# Altium PCB PCB1.PcbDoc
Units mil, origin at the board's own origin, x right, y up, seen from the top; angles counter-clockwise.
Board outline 1315.92 x 860.73 mil, 2 copper layers (Top Layer, Bottom Layer); 22 components, 44 nets, 157 pads, 30 vias.
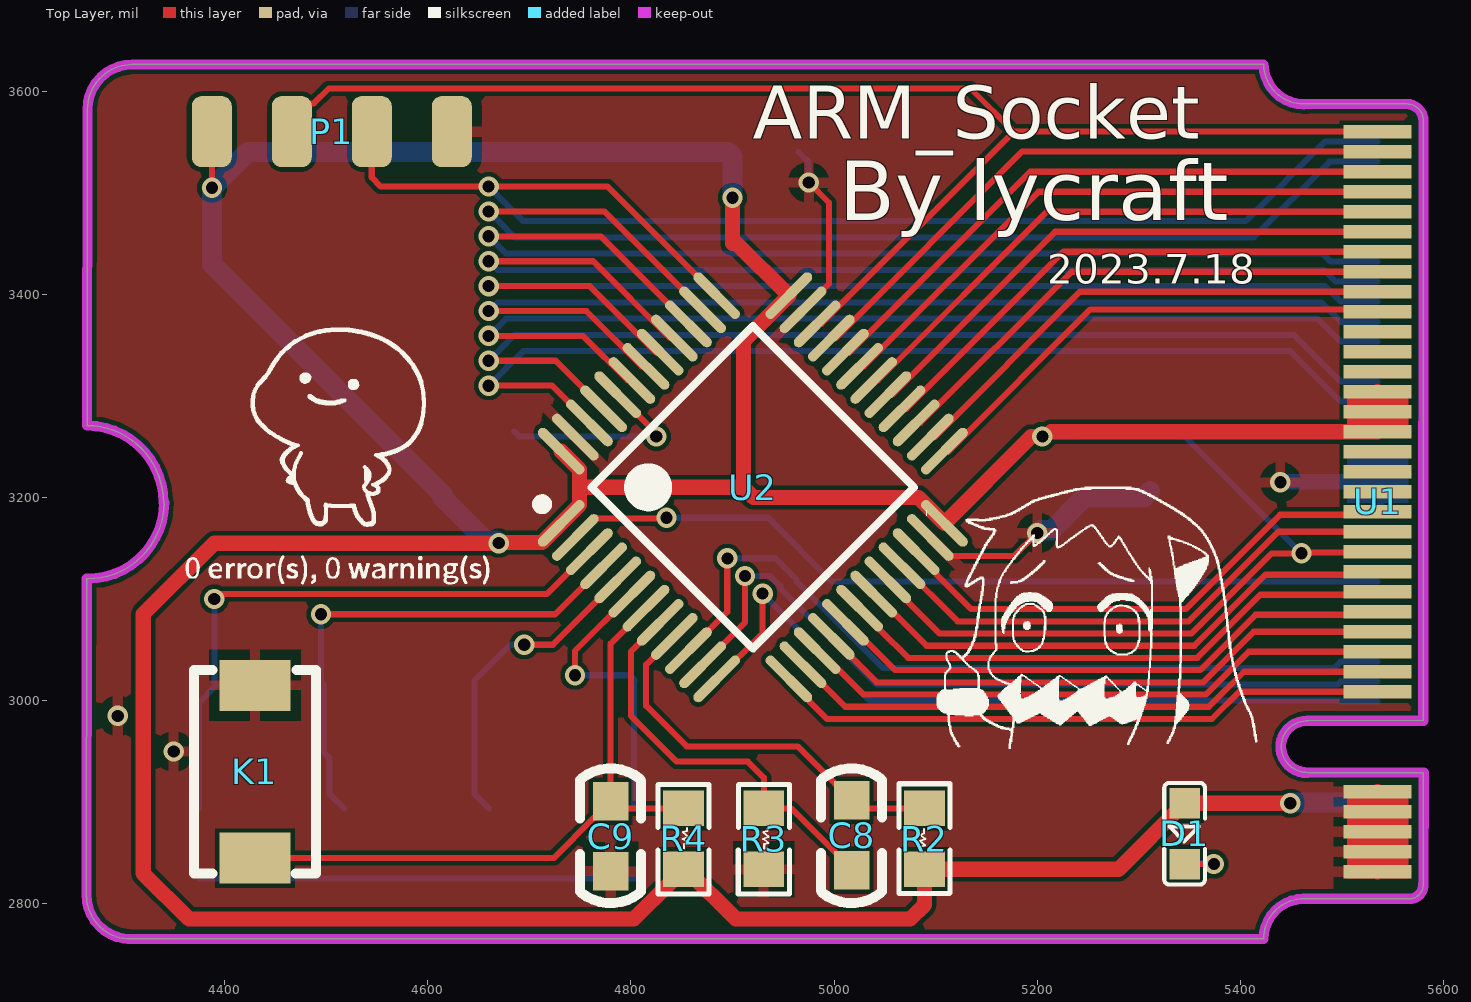
[diagram p0: Top Layer view]
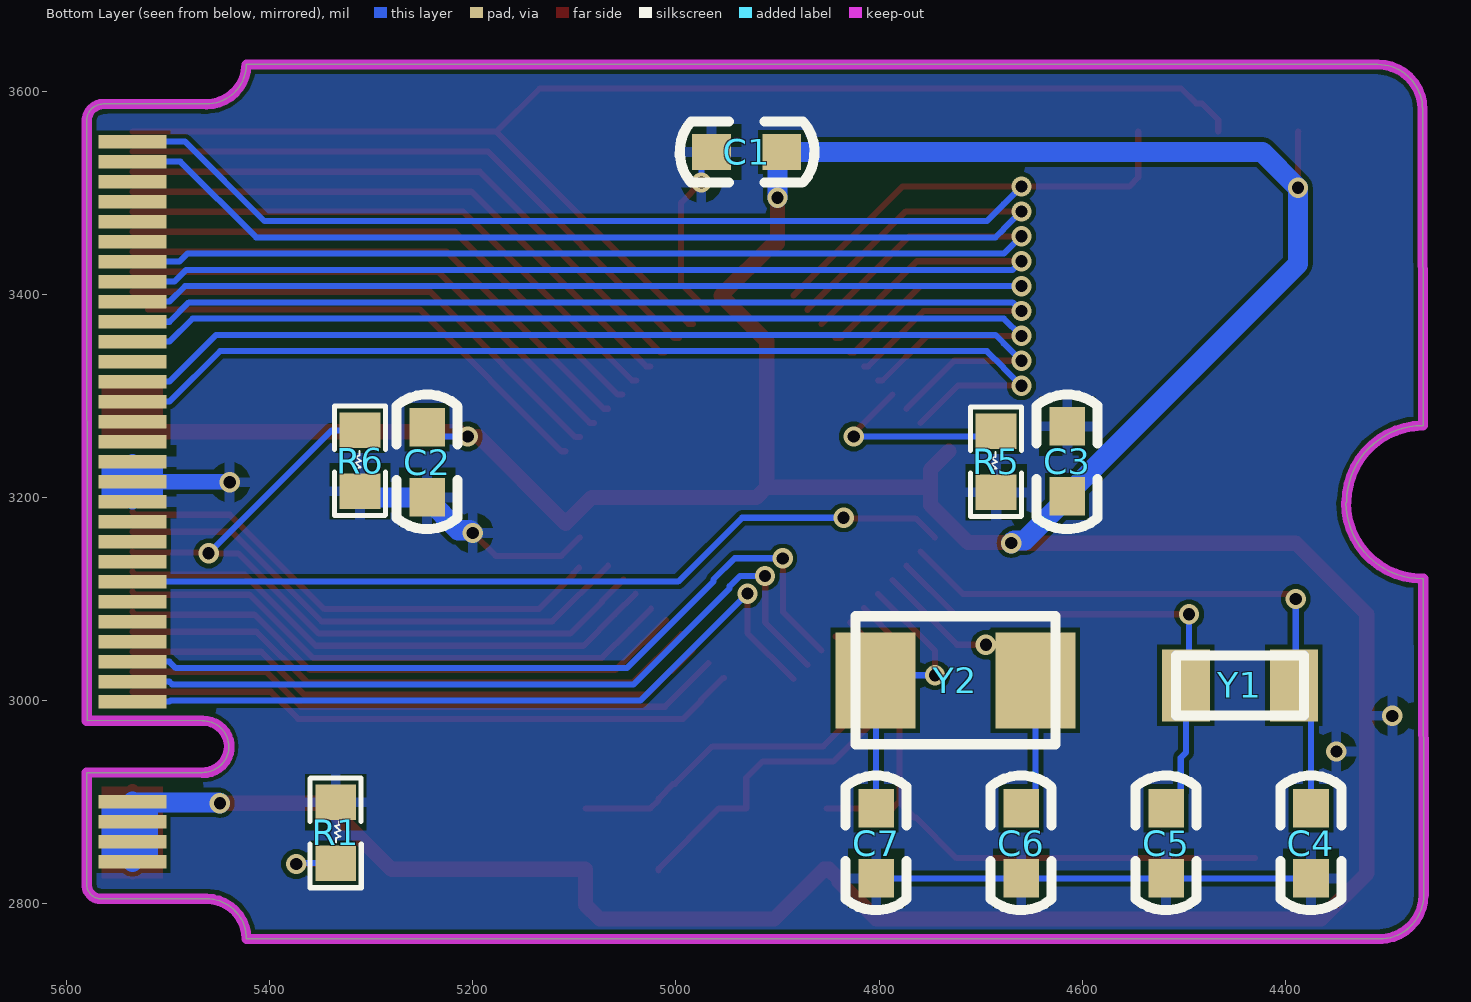
[diagram p1: Bottom Layer view, seen from below]
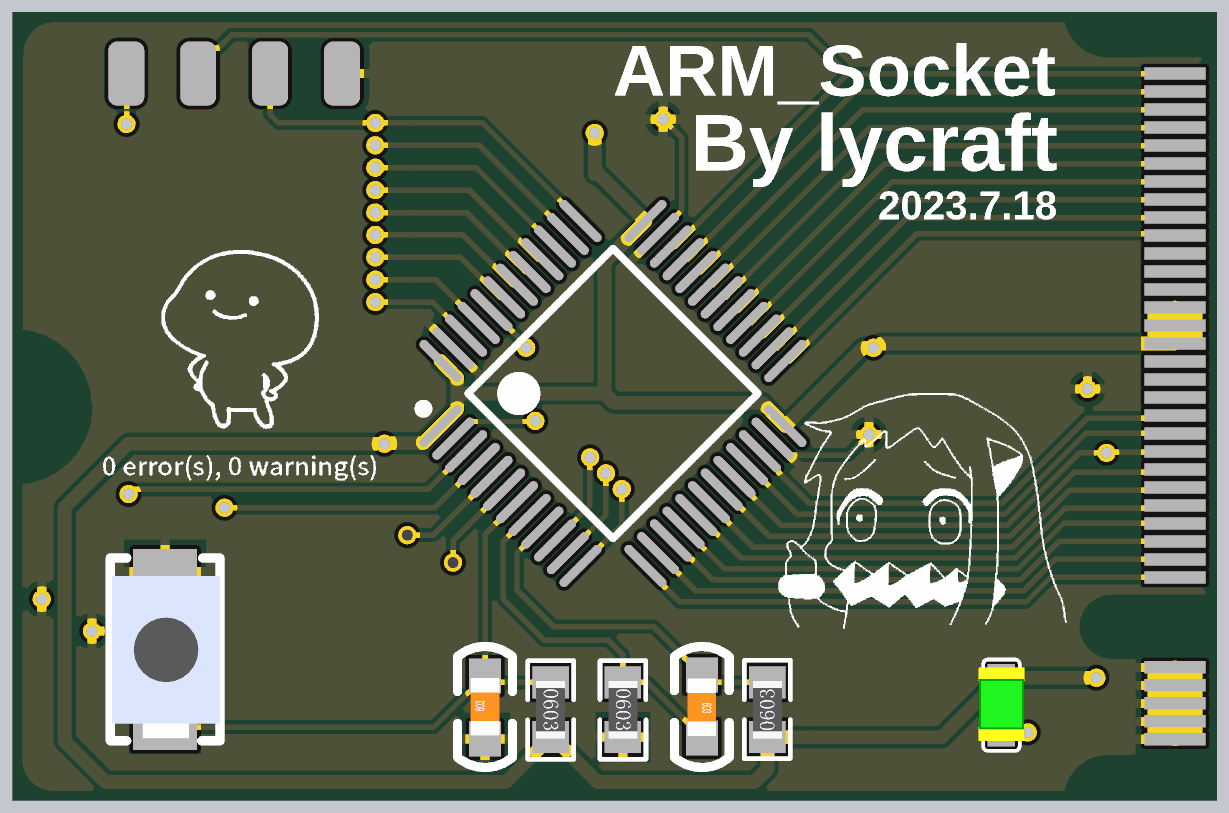
[diagram p2: 3D render of the assembled board from above, using the file's embedded part models]
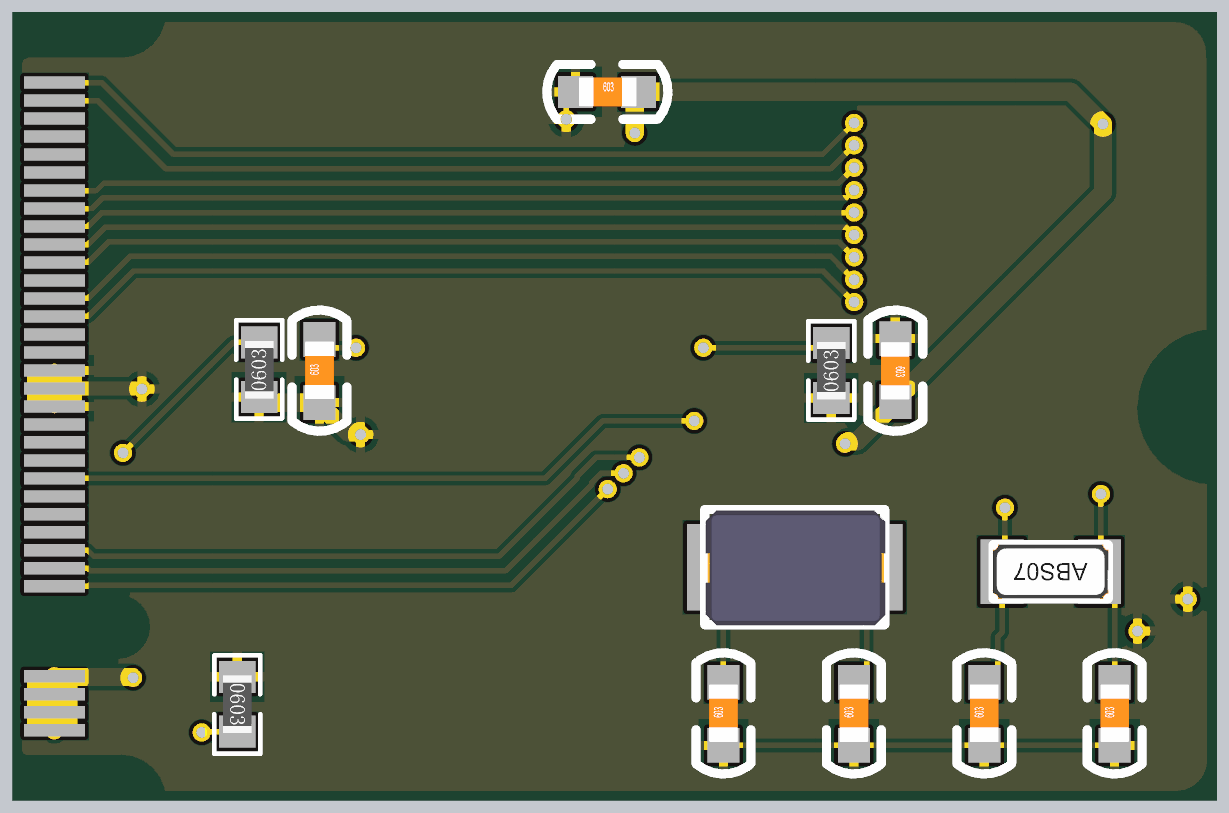
[diagram p3: 3D render of the assembled board from below, using the file's embedded part models]

## Layer stack, top to bottom
Top Solder: solder mask 0.4, Solder Resist, Dk 3.5
Top Layer: signal copper 1.4
Dielectric 1: dielectric 12.6, FR-4, Dk 4.8
Bottom Layer: signal copper 1.4
Bottom Solder: solder mask 0.4, Solder Resist, Dk 3.5

## Board outline
4264.09,2808.7 ccw(c4307.28,2808.7) 4307.28,2765.51 4305,2765.51 5422.8,2765.51 5422.8,2765.61 cw(c5462.17,2765.61) 5462.17,2804.98 5565.83,2804.98 ccw(c5565.78,2819.2) 5580.01,2819.25 5580.01,2929.15 5580.01,2929.25 5466.37,2929.25 cw(c5466.06,2955.31) 5440,2955 cw(c5465.64,2954.53) 5466.11,2980.17 5579.66,2980.56 5579.66,2980.16 5580.01,3570.65 ccw(c5563.75,3570.98) 5564.08,3587.25 5564.01,3587.25 5462.56,3587.25 cw(c5462.17,3626.62) 5422.8,3626.23 5422.8,3626.13 4310,3626.13 4309.34,3626.13 ccw(c4309.34,3581.9) 4265.11,3581.9 4264.7,3270.7 4265.03,3270.7 cw(c4264.6,3195.3) 4340,3195.3 4340.7,3194.97 cw(c4265.3,3195.4) 4265.3,3120 4264.5,3120

## Design rules (kind name [scope] priority, off if disabled: settings)
Clearance [All] p1: gap=4.5 ignorepadtopadclearanceinfootprint=TRUE
PolygonConnect [All] p1: connectstyle=Relief reliefconductorwidth=10 reliefentries=4 polygonreliefangle="90 Angle" airgapwidth=10
RoutingVias [All] p1: holewidth=12 width=20 viastyle="Through Hole" minholewidth=12 minwidth=20 maxholewidth=12 maxwidth=20
SolderMaskExpansion [All] p1: expansion=4 istentingtop=FALSE
Width [All] p1: maxlimit=50 minlimit=6 preferedwidth=6 minimp=50.000000 maximp=50.000000 favimp=50.000000
30 further rules are at their usual default settings.

## Components (designator, comment, footprint, x,y, rotation, side; value= is the part's Value field where it differs from the comment)
C1 "0.1uF" C0603 4965,3540 r180 bottom value=104
C2 "0.1uF" C0603 5245,3200 r90 bottom value=104
C3 "0.1uF" C0603 4615,3270 r270 bottom value=104
C4 "10pF" C0603 4375,2825 r90 bottom value=104
C5 "10pF" C0603 4517.67,2825 r90 bottom value=104
C6 "22pF" C0603 4660.33,2825 r90 bottom value=104
C7 "22pF" C0603 4803,2825 r90 bottom value=104
C8 "0.1uF" C0603 5017.19,2902 r270 top value=104
C9 "0.1uF" C0603 4780,2832 r90 top value=104
D1 "color?" LED0603 5345,2870 r270 top
K1 "Button" BUTTON-K2 4430,3015 r270 top
P1 "HDR1x4_2.0" "HDR 4_2" 4387.52,3560 r90 top
R1 "10K" R0603 5335,2870 r270 bottom value=1K
R2 "10" R0603 5089,2864 r90 top value=1K
R3 "0" R0603 4930.87,2864 r270 top value=1K
R4 "10K" R0603 4851.81,2864 r270 top value=1K
R5 "10K" R0603 4685,3235 r90 bottom value=1K
R6 "10K" R0603 5311,3236 r90 bottom value=1K
U1 "M.2-M-Key 金手指" M.2_NGFF 5495.01,3245.15 r0 top
U2 "STM32F103CBT6" STM-LQFP48_L 4920,3210 r45 top
Y1 "XTAL 32.768KHz 2P" "3215 2Pin" 4445,3015 r0 bottom
Y2 "8M" "5032 2Pin" 4725,3020 r0 bottom

## Footprints (in the part's own frame and the unit in brackets; to place one, negate y for a bottom-side part, rotate by r counter-clockwise, add the part's x,y. Pads: shape width x height; smd on the part's side, far side on the other; paste and mask are expansions set on the pad)
"3215 2Pin" [mm]
  rect 1.2x1.8 smd: 1(-1.35,0) 2(1.35,0)
  silkscreen extent -1.6,-0.75 1.6,0.75, body extent -1.61,-0.76 1.61,0.76, height 0.91
"5032 2Pin" [mm]
  rect 2x2.4 smd: 1(-2,0) 2(2,0)
  silkscreen extent -2.5,-1.6 2.5,1.6, body extent -2.53,-1.57 2.47,1.63, height 1.3
BUTTON-K2 [mil]
  rect 50x70 smd: 1(0,0) 2(170,0)
  silkscreen extent -15,-60 185,60, body extent -13,-58 183,60, height 79
C0603 [mil]
  rect 38x35 smd: 1(0,0) 2(69,0)
  silkscreen extent -31,-30 101,30, body extent 4,-16 67,16, height 12
"HDR 4_2" [mm]
  rrect50% 1.778x1 smd: 1(0,0) 2(0,-2) 3(0,-4) 4(0,-6)
LED0603 [mil]
  rect 30x30 smd: 1(-29,0) 2(31,0)
  silkscreen extent -49,-20 51,20, body extent -40,-25 40,25, height 43
M.2_NGFF [mm]
  rect 1.7x0.34 smd paste+0 mask+0.102: 1(1.016,7.997) 3(1.016,7.497) 5(1.016,6.996) 7(1.016,6.496) 9(1.016,5.996) 11(1.016,5.496) 13(1.016,4.996) 15(1.016,4.496) 17(1.016,3.996) 19(1.016,3.496) 21(1.016,2.996) 23(1.016,2.496) 25(1.016,1.996) 27(1.016,1.496) 29(1.016,0.996) 31(1.016,0.496) 33(1.016,-0.004) 35(1.016,-0.504) 37(1.016,-1.004) 39(1.016,-1.504) 41(1.016,-2.004) 43(1.016,-2.504) 45(1.016,-3.004) 47(1.016,-3.504) 49(1.016,-4.004) 51(1.016,-4.504) 53(1.016,-5.004) 55(1.016,-5.504) 57(1.016,-6.004) 67(1.016,-8.504) 69(1.016,-9.004) 71(1.016,-9.504) 73(1.016,-10.004) 75(1.016,-10.504)
  rect 1.7x0.34 smd far side paste+0 mask+0.102: 2(1.016,7.747) 4(1.016,7.248) 6(1.016,6.748) 8(1.016,6.248) 10(1.016,5.748) 12(1.016,5.248) 14(1.016,4.748) 16(1.016,4.248) 18(1.016,3.748) 20(1.015,3.246) 22(1.016,2.748) 24(1.016,2.248) 26(1.016,1.748) 28(1.016,1.248) 30(1.016,0.748) 32(1.016,0.248) 34(1.016,-0.252) 36(1.016,-0.752) 38(1.016,-1.252) 40(1.016,-1.752) 42(1.015,-2.251) 44(1.016,-2.752) 46(1.016,-3.252) 48(1.016,-3.752) 50(1.016,-4.252) 52(1.016,-4.752) 54(1.016,-5.252) 56(1.016,-5.752) 58(1.016,-6.252) 68(1.016,-8.752) 70(1.016,-9.252) 72(1.016,-9.752) 74(1.016,-10.252)
  Keep-Out Layer lines w0.254: -1.834,-12.183 cw(c-0.834,-12.183) -0.834,-11.183 1.804,-11.188 ccw(c1.818,-10.848) 2.157,-10.808 ; -1.834,9.677 ccw(c-0.834,9.677) -0.834,8.677 1.778,8.687 ; 1.753,8.687 cw(c1.732,8.26) 2.159,8.255 ; 2.159,-10.82 2.167,-8.026 ; 2.159,-8.026 -0.734,-8.033 cw(c-0.765,-7.383) -0.734,-6.733 2.159,-6.731 2.159,8.306
R0603 [mil]
  rect 35x40 smd: 1(-30,0) 2(30,0)
  silkscreen extent -54,-25 54,25, body extent -32,-16 31,16, height 18
STM-LQFP48_L [mm] "QFP, 48-Leads, Body 7x7mm, Pitch 0.5mm, IPC High Density"
  oval 1.55x0.25 smd: 1(-4.025,2.75) 2(-4.025,2.25) 3(-4.025,1.75) 4(-4.025,1.25) 5(-4.025,0.75) 6(-4.025,0.25) 7(-4.025,-0.25) 8(-4.025,-0.75) 9(-4.025,-1.25) 10(-4.025,-1.75) 11(-4.025,-2.25) 12(-4.025,-2.75) 25(4.025,-2.75) 26(4.025,-2.25) 27(4.025,-1.75) 28(4.025,-1.25) 29(4.025,-0.75) 30(4.025,-0.25) 31(4.025,0.25) 32(4.025,0.75) 33(4.025,1.25) 34(4.025,1.75) 35(4.025,2.25) 36(4.025,2.75)
  oval 0.25x1.55 smd: 13(-2.75,-4.025) 14(-2.25,-4.025) 15(-1.75,-4.025) 16(-1.25,-4.025) 17(-0.75,-4.025) 18(-0.25,-4.025) 19(0.25,-4.025) 20(0.75,-4.025) 21(1.25,-4.025) 22(1.75,-4.025) 23(2.25,-4.025) 24(2.75,-4.025) 37(2.75,4.025) 38(2.25,4.025) 39(1.75,4.025) 40(1.25,4.025) 41(0.75,4.025) 42(0.25,4.025) 43(-0.25,4.025) 44(-0.75,4.025) 45(-1.25,4.025) 46(-1.75,4.025) 47(-2.25,4.025) 48(-2.75,4.025)
  silkscreen extent -4.15,-2.85 2.85,3.55, body extent -3.5,-3.5 3.5,3.5, height 1.6

## Part data
C1 C2 C3 C4 C5 C6 C7 C8 C9: library part 贴片C, "Capacitor", LatestRevisionDate=17-Jul-2002, LatestRevisionNote="Re-released for DXP Platform.", PackageReference=RAD-0.3, Published=8-Jun-2000, Publisher="Altium Limited"
D1: library part 贴片LED, "LED", Type=0402
R1 R2 R3 R4 R5 R6: library part 贴片R, "Resistor", Published=8-Jun-2000, Publisher="Altium Limited", Revision="July-2002: Re-released for DXP Platform."
U2: "ARM Cortex-M3 32-bit MCU, 128 KB Flash, 20 KB Internal RAM, 37 I/Os, 48-pin LQFP, -40 to 85 degC, Tray", I/Os (High Current)=37, Operating Frequency(F) (Processor speed) (MHz)=72, Supply Voltage(Vcc) min (V)=2, A/D Converter="2x12-bit (10 Channel)", ComponentLink1Description="Manufacturer URL", ComponentLink1URL=http://www.st.com/web/en/home.html, ComponentLink2Description=Datasheet, ComponentLink2URL=http://www.st.com/st-web-ui/static/active/en/resource/technical/document/datasheet/CD00161566.pdf, ComponentLink3Description="Package Specification", ComponentLink3URL=http://www.st.com/st-web-ui/static/active/en/resource/technical/document/datasheet/DM00058181.pdf, Core="ARM Cortex-M3", DatasheetVersion="Rev. 16", FLASH Size (Prog) (kB)=128, Internal RAM Size (kB)=20, Mounting Technology="Surface Mount", PackageDescription="48-Pin Low Profile Quad Flat Package, 7 x 7 mm Body, 0.5 mm Pitch", PackageReference=LQFP48, PackageVersion="Rev. 6, 06/2013", Packing=Tray, PartNumber=STM32F103CBT6
Y2: library part "XTAL 8Mhz 2pin"
K1: LatestRevisionDate=17-Jul-2002, LatestRevisionNote="Re-released for DXP Platform.", PackageReference=SPST-2, Published=24-Mar-1999, Publisher="Altium Limited"
U1: Contributor=zengjf, spicePre=U, spiceSymbolName=M2-M-Key

## Via types
v1: diameter 20, hole 12, Top Layer to Bottom Layer, 30 vias

## Nets (pads, with @x,y where several pads share a name; then routed paths per layer and width w, separated by ;. In a path a pad name is that pad's centre, name@x,y a point inside that pad or via, vN(x,y) a via of type N, cw(c..) or ccw(c..) an arc to the next point about the centre after c; other vN are vias at no path point)
BOOT0: R5.2 U2.44 | length 199
  Top Layer w6: U2.44 4825,3263.24 v1(4825,3260)
  Bottom Layer w6: R5.2 4690,3260 v1(4825,3260)
BOOT1: R6.2 U1.43 U2.20 | length 738.1
  Top Layer w6: U2.20@5051.79,3118.93 5072.95,3097.77 5072.95,3097.05 5104,3066 5351.75,3066 5430.75,3145 v1(5460,3145) 5460.79,3145.79 5534.21,3145.79 U1.43
  Bottom Layer w6: R6.2 5339,3266 v1(5460,3145)
GND: C1.1 C2.1 C3.1 C4.1 C5.1 C6.1 C7.1 C9.1 K1.1 P1.4 R1.1 R3.2 R5.1 R6.1 U1.34 U1.36 U1.38 U1.67 U1.69 U1.71 U1.73 U1.75 U2.23 U2.35 U2.47 | length 1071.4
  Top Layer w6: U2.35 4995,3410.27 4995,3490 v1(4975,3510) ; U2.23 5112.78,3142.49 5177.49,3142.49 v1(5200,3165)
  Top Layer w15: U1.75 U1.73 U1.71 U1.69 U1.67
  Bottom Layer w6: C4.1 C7.1 ; C1.1 4975,3530 v1(4975,3510)
  Bottom Layer w15: v1(5439.28,3214.93) 5439.87,3215.53 U1.36 ; U1.38 U1.36 ; U1.34 U1.36
  Bottom Layer w20: v1(5200,3165) 5202.68,3167.68 5214.18,3167.68 5245,3198.5 C2.1 5305,3200 R6.1
  other v1: 4350,2950 4295,2985
NetD1_2: D1.2 R1.2 | length 68.1
  Top Layer w6: D1.2 5345.19,2839.19 v1(5373.85,2839.19)
  Bottom Layer w6: R1.2 5373.03,2840 v1(5373.85,2839.19)
NRST: C9.2 K1.2 R4.1 U2.7 | length 653.2
  Top Layer w6: K1.2 4724,2845 4764,2885 4765.5,2885 4780,2899.5 C9.2 ; U2.7 4780,3056.08 C9.2 ; R4.1 4787,2894 C9.2
OSC32_IN: C4.2 U2.3 Y1.1 | length 603.2
  Top Layer w6: v1(4390,3100) 4390,3101.49 4393.51,3105 4717.56,3105 U2.3
  Bottom Layer w6: C4.2 4375,2998.15 Y1.1 4390,3016.85 v1(4390,3100)
OSC32_OUT: C5.2 U2.4 Y1.2 | length 498.3
  Top Layer w6: v1(4495,3085) 4725.4,3085 U2.4
  Bottom Layer w6: v1(4495,3085) 4495,3018.15 Y1.2 4498.15,2948.79 4503.17,2943.78 4503.17,2908.5 C5.2
OSC_IN: C6.2 U2.5 Y2.1 | length 313.6
  Top Layer w6: v1(4695,3055) 4723.24,3055 U2.5
  Bottom Layer w6: C6.2 4646.26,2908.07 Y2.1 4681.26,3055 v1(4695,3055)
OSC_OUT: C7.2 U2.6 Y2.2 | length 290.2
  Top Layer w6: v1(4745,3025) 4745,3048.92 U2.6
  Bottom Layer w6: v1(4745,3025) 4798.74,3025 Y2.2 4803,3019.26 C7.2
PA0: U1.54 U2.10 | length 795.4
  Top Layer w6: U2.10 4894.82,3087.39 4894.82,3139.82 v1(4895,3140)
  Bottom Layer w6: v1(4895,3140) 4895.18,3140.18 4942.2,3140.18 4963.15,3119.23 4963.15,3117.11 5048.25,3032 5492.17,3032 5498.54,3038.37 U1.54
PA1: U1.56 U2.11 | length 774
  Top Layer w6: U2.11 4912.15,3076.87 4912.15,3122.5 v1(4912.32,3122.68)
  Bottom Layer w6: v1(4912.32,3122.68) 4912.5,3122.85 4936.9,3122.85 4947.15,3112.6 4947.15,3110.48 5041.63,3016 5495.86,3016 5498.54,3018.68 U1.56
PA2: U1.58 U2.12 | length 752.1
  Top Layer w6: U2.12 4929.65,3066.53 v1(4929.65,3105.35)
  Bottom Layer w6: v1(4929.65,3105.35) 5035,3000 5497.54,3000 5498.54,2999 U1.58
PA3: U1.57 U2.13 | length 610.8
  Top Layer w6: U2.13@4952.56,3022.44 4953.41,3022.44 4975.51,3000.34 4975.51,2999.49 4993,2982 5372,2982 5398.78,3008.78 U1.57
PA4: U1.55 U2.14 | length 598.8
  Top Layer w6: U2.14@4968.2,3036.8 5011,2994 5369,2994 5403.47,3028.47 U1.55
PA5: U1.53 U2.15 | length 586.8
  Top Layer w6: U2.15@4983.84,3049.77 5004.39,3029.21 5005.79,3029.21 5029,3006 5366,3006 5408.15,3048.15 U1.53
PA6: U1.51 U2.16 | length 580.8
  Top Layer w6: U2.16@4994.54,3065.46 5042,3018 5363.15,3018 5412.99,3067.84 U1.51
PA7: U1.49 U2.17 | length 569.4
  Top Layer w6: U2.17@5009.92,3079.37 5032.23,3057.05 5032.95,3057.05 5060,3030 5360.3,3030 5414.82,3084.52 5532,3084.52 U1.49
PA8: U1.11 U2.29 | length 548.5
  Top Layer w6: U2.29 5057.17,3301.17 5217.54,3461.54 U1.11
PA9: U1.9 U2.30 | length 564.8
  Top Layer w6: U2.30 5043.25,3315.09 5209.38,3481.22 U1.9
PA10: U1.7 U2.31 | length 581.1
  Top Layer w6: U2.31 5029.33,3329.01 5201.23,3500.91 U1.7
PA11: U1.5 U2.32 | length 597.4
  Top Layer w6: U2.32 5015.41,3342.93 5193.07,3520.59 U1.5
PA12: U1.3 U2.33 | length 613.7
  Top Layer w6: U2.33 5001.5,3356.85 5184.94,3540.29 U1.3
PA13: P1.2 U1.1 U2.34 | length 1382.6
  Top Layer w6: P1.2 4466.26,3571.61 4482.42,3587.78 4488.04,3587.78 4502.77,3602.5 5134.29,3602.5 5176.8,3559.99 ; U2.34 4987.58,3370.77 5176.8,3559.99 ; U1.1 5176.8,3559.99
PA14: P1.3 U1.2 U2.37 | length 1378
  Top Layer w6: P1.3 4545,3515 4554,3506 v1(4660,3506) 4777.11,3506 U2.37
  Bottom Layer w6: v1(4660,3506) 4660.25,3506 4677.5,3488.75 ; U1.2 5483.15,3550.15 5405,3472 4694.25,3472 ; 4677.5,3488.75 4677.5,3488.5 4694,3472 4694.25,3472 ; 4677.5,3488.75 4694.25,3472
PA15: U1.4 U2.38 | length 1167.2
  Top Layer w6: v1(4660,3481.5) 4773.77,3481.5 U2.38
  Bottom Layer w6: v1(4660,3481.5) 4660.25,3481.5 4677.5,3464.25 4677.5,3464 4685.5,3456 5413.26,3456 5487.75,3530.49 U1.4
PB0: U1.47 U2.18 | length 557.6
  Top Layer w6: U2.18@5024.51,3090.53 U2.18@5045.11,3069.93 ; U2.18@5045.11,3069.89 5073,3042 5357.45,3042 5419.66,3104.21 5532,3104.21 U1.47
PB1: U1.45 U2.19 | length 546.6
  Top Layer w6: U2.19@5039.79,3105.17 U2.19@5060.07,3084.89 ; U2.19@5060.11,3084.89 5091,3054 5354.6,3054 5424.49,3123.89 5532,3123.89 U1.45
PB3: U1.14 U2.39 | length 1117.7
  Top Layer w6: v1(4660,3457) 4770.44,3457 U2.39
  Bottom Layer w6: v1(4660,3457) 4660.25,3457 4677.25,3440 5480.93,3440 5488.86,3432.07 U1.14
PB4: U1.16 U2.40 | length 1097.4
  Top Layer w6: v1(4660,3432.5) 4762.85,3432.5 4838.5,3356.85 U2.40
  Bottom Layer w6: v1(4660,3432.5) 4660.25,3432.5 4668.75,3424 5482.08,3424 5493.7,3412.38 U1.16
PB5: U1.18 U2.41 | length 1077.1
  Top Layer w6: v1(4660,3408) 4759.52,3408 4824.59,3342.93 U2.41
  Bottom Layer w6: v1(4660,3408) 5483.24,3408 5498.54,3392.7 U1.18
PB6: U1.20 U2.42 | length 1063.9
  Top Layer w6: v1(4660,3383.5) 4756.18,3383.5 4810.67,3329.01 U2.42
  Bottom Layer w6: v1(4660,3383.5) 4660.25,3383.5 4668.75,3392 5479.45,3392 5498.52,3372.93 U1.20
PB7: U1.22 U2.43 | length 1050.6
  Top Layer w6: v1(4660,3359) 4752.84,3359 4796.75,3315.09 U2.43
  Bottom Layer w6: v1(4660,3359) 4660.25,3359 4677.25,3376 5475.87,3376 5498.54,3353.33 U1.22
PB8: U1.26 U2.45 | length 1037.5
  Top Layer w6: v1(4660,3334.5) 4725.9,3334.5 U2.45
  Bottom Layer w6: v1(4660,3334.5) 4660.25,3334.5 4677.5,3351.75 4677.5,3352 4685.5,3360 5452.5,3360 5498.54,3313.96 U1.26
PB9: U1.28 U2.46 | length 1024.2
  Top Layer w6: v1(4660,3310) 4722.56,3310 U2.46
  Bottom Layer w6: v1(4660,3310) 4660.25,3310 4677.5,3327.25 4677.5,3327.5 4694,3344 5448.81,3344 5498.54,3294.27 U1.28
PB10: U1.41 U2.21 | length 527.4
  Top Layer w6: U2.21 5121.6,3078 5348.9,3078 5437.16,3166.26 U1.41
PB11: U1.39 U2.22 | length 496.9
  Top Layer w6: U2.22@5095.57,3130.82 5100.79,3125.61 5100.79,3124.21 5135,3090 5346.06,3090 5439.01,3182.95 5532,3182.95 U1.39
PB12: U1.19 U2.25 | length 468.9
  Top Layer w6: U2.25 5112.85,3245.49 5252.36,3385 U1.19@5519.73,3385
PB13: U1.17 U2.26 | length 499.6
  Top Layer w6: U2.26 5098.93,3259.41 5242,3402.48 U1.17
PB14: U1.15 U2.27 | length 515.9
  Top Layer w6: U2.27 5085.01,3273.33 5233.85,3422.17 U1.15
PB15: U1.13 U2.28 | length 532.2
  Top Layer w6: U2.28 5071.09,3287.25 5225.69,3441.85 U1.13
"PC13 RTC": U1.46 U2.2 | length 823.8
  Top Layer w6: U2.2 4764.07,3179.34 4834.34,3179.34 v1(4835,3180)
  Bottom Layer w6: v1(4835,3180) 4935,3180 4997.89,3117.11 U1.46
VDD: C1.2 C2.2 C3.2 D1.1 P1.1 R2.1 R4.2 U1.27 U1.29 U1.31 U1.68 U1.70 U1.72 U1.74 U2.1 U2.24 U2.36 U2.48 | length 4529.3
  Top Layer w6: P1.1 4387.79,3559.73 v1(4387.79,3504.85)
  Top Layer w15: U2.48 4749.49,3227.4 4749.49,3210 ; v1(4900,3495) 4900,3450 4904.1,3450 U2.36 4910.78,3353.89 4910.78,3210 ; v1(5205,3260) 5194.1,3260 U2.24 5083.11,3200 4920.78,3200 4910.78,3210 ; v1@5213.48,3264.69 U1.31 U1.29 U1.27 ; v1(5448.93,2898.98) D1.1 5280,2834 R2.1 5089,2799 5075,2785 4903.31,2785 4854.31,2834 4849.31,2834 4839.31,2824 4839.31,2821.5 4802.81,2785 4365,2785 4320,2830 4320,3085 4390,3155 v1(4670,3155) 4670.71,3155.71 4712.59,3155.71 U2.1 4749.49,3192.6 4749.49,3210 ; 4749.49,3210 4910.78,3210
  Bottom Layer w6: v1(5205,3260) 5236,3260 C2.2
  Bottom Layer w20: v1(4670,3155) 4667.32,3157.68 4656.82,3157.68 4615,3199.5 C3.2 4615,3202.5 4387.79,3429.71 v1(4387.79,3504.85) 4422.94,3540 C1.2 4900,3536 v1(4900,3495) ; v1(5448.93,2898.98) 5449.72,2899.78 5534.21,2899.78 U1.68 U1.70 U1.72 U1.74
VDDA: C8.1 R2.2 U2.9 | length 396.4
  Top Layer w6: U2.9@4842.75,3063.15 4815,3035.4 4815,2995 4855,2955 4964.19,2955 5001.19,2918 5002.69,2918 5017.19,2903.5 C8.1 5025.19,2894 R2.2
VSSA: C8.2 R3.1 U2.8 | length 402.7
  Top Layer w6: U2.8 4800,3048.24 4800,2985 4845,2940 4915,2940 4930.87,2924.13 R3.1 4957.69,2894 5017.19,2834.5 C8.2
pads on no net: U1.6 U1.8 U1.10 U1.12 U1.21 U1.23 U1.24 U1.25 U1.30 U1.32 U1.33 U1.35 U1.37 U1.40 U1.42 U1.44 U1.48 U1.50 U1.52

## Polygon pours and split planes (outlines as drawn)
GND on Bottom Layer "GND_L02_P000" (solid, remove dead copper, pour order 0): 4190,3705 4175,3690 4175,2605 5535,2605 5660,2730 5660,3645
GND on Top Layer "GND_L01_P001" (solid, remove dead copper, pour order 1): 4220,3675 4220,2720 4230,2710 4260,2740 5705,2740 5705,3530 5585,3650

## Keep-outs
Keep-Out Layer:
  lines w10: 4264.5,3120 4264.09,2808.7 ccw(c4307.28,2808.7) 4307.28,2765.51 ; 4264.7,3270.7 4265.11,3581.9 cw(c4309.34,3581.9) 4309.34,3626.13 ; 4265.03,3270.7 cw(c4264.6,3195.3) 4340,3195.3 ; 4265.3,3120 ccw(c4265.3,3195.4) 4340.7,3194.97 ; 4305,2765.51 5422.8,2765.51 ; 4310,3626.13 5422.8,3626.13 ; 5422.8,2765.61 cw(c5462.17,2765.61) 5462.17,2804.98 5565.83,2804.98 ccw(c5565.78,2819.2) 5580.01,2819.25 5580.01,2929.15 ; 5422.8,3626.23 ccw(c5462.17,3626.62) 5462.56,3587.25 5564.01,3587.25 ; 5564.08,3587.25 cw(c5563.75,3570.98) 5580.01,3570.65 5579.66,2980.16 ; 5579.66,2980.56 5466.11,2980.17 ccw(c5465.64,2954.53) 5440,2955 ccw(c5466.06,2955.31) 5466.37,2929.25 5580.01,2929.25

## Other copper
Top Layer:
  region net GND: 5505,2915 5505,2825 5565,2825 5565,2915
  region net VDD: 5505,3310 5505,3260 5565,3260 5565,3310
Bottom Layer:
  region net VDD: 5510,2905 5510,2840 5565,2840 5565,2905
  region net GND: 5505,3240 5505,3195 5565,3195 5565,3240

## Silkscreen, mask and mechanical layers (free items; w line width, h text height)
Top Overlay:
  drawing of 36 lines, arcs and shapes, not listed
  text "ARM_Socket" at 4919.92,3535.91 h90
  text "By lycraft" at 5005,3453.87 h100
  text "2023.7.18" at 5210,3400.6 h50